# Altium PCB laser_driver2.PcbDoc (part 1 of 2)
Units mm, origin at the board's own origin, x right, y up, seen from the top; angles counter-clockwise.
Board outline 75 x 96.01 mm, 2 copper layers (TOP, BOTTOM), stack 0.264 mm thick; 144 components, 21 nets, 356 pads, 80 vias.
Unrouted connection lines stored in the file: 63.
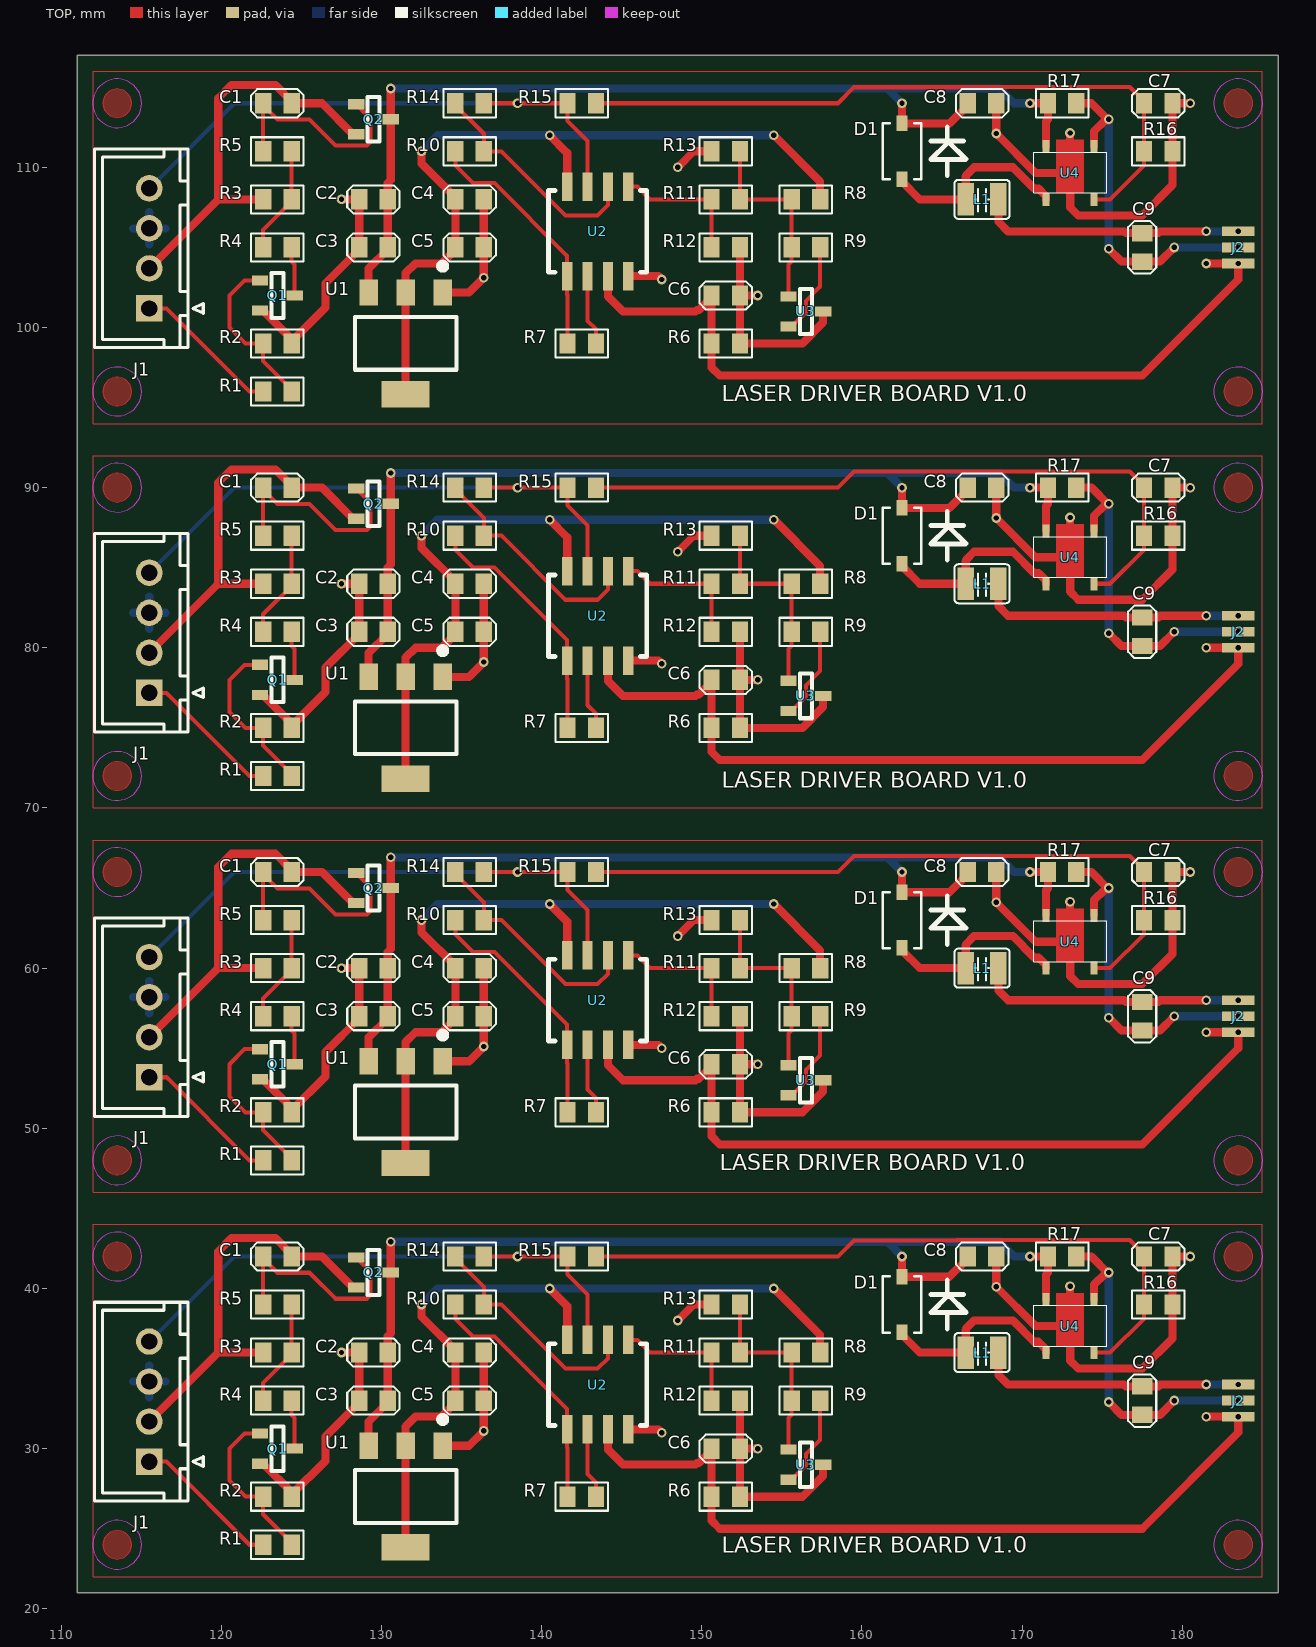
[diagram p0: TOP view]
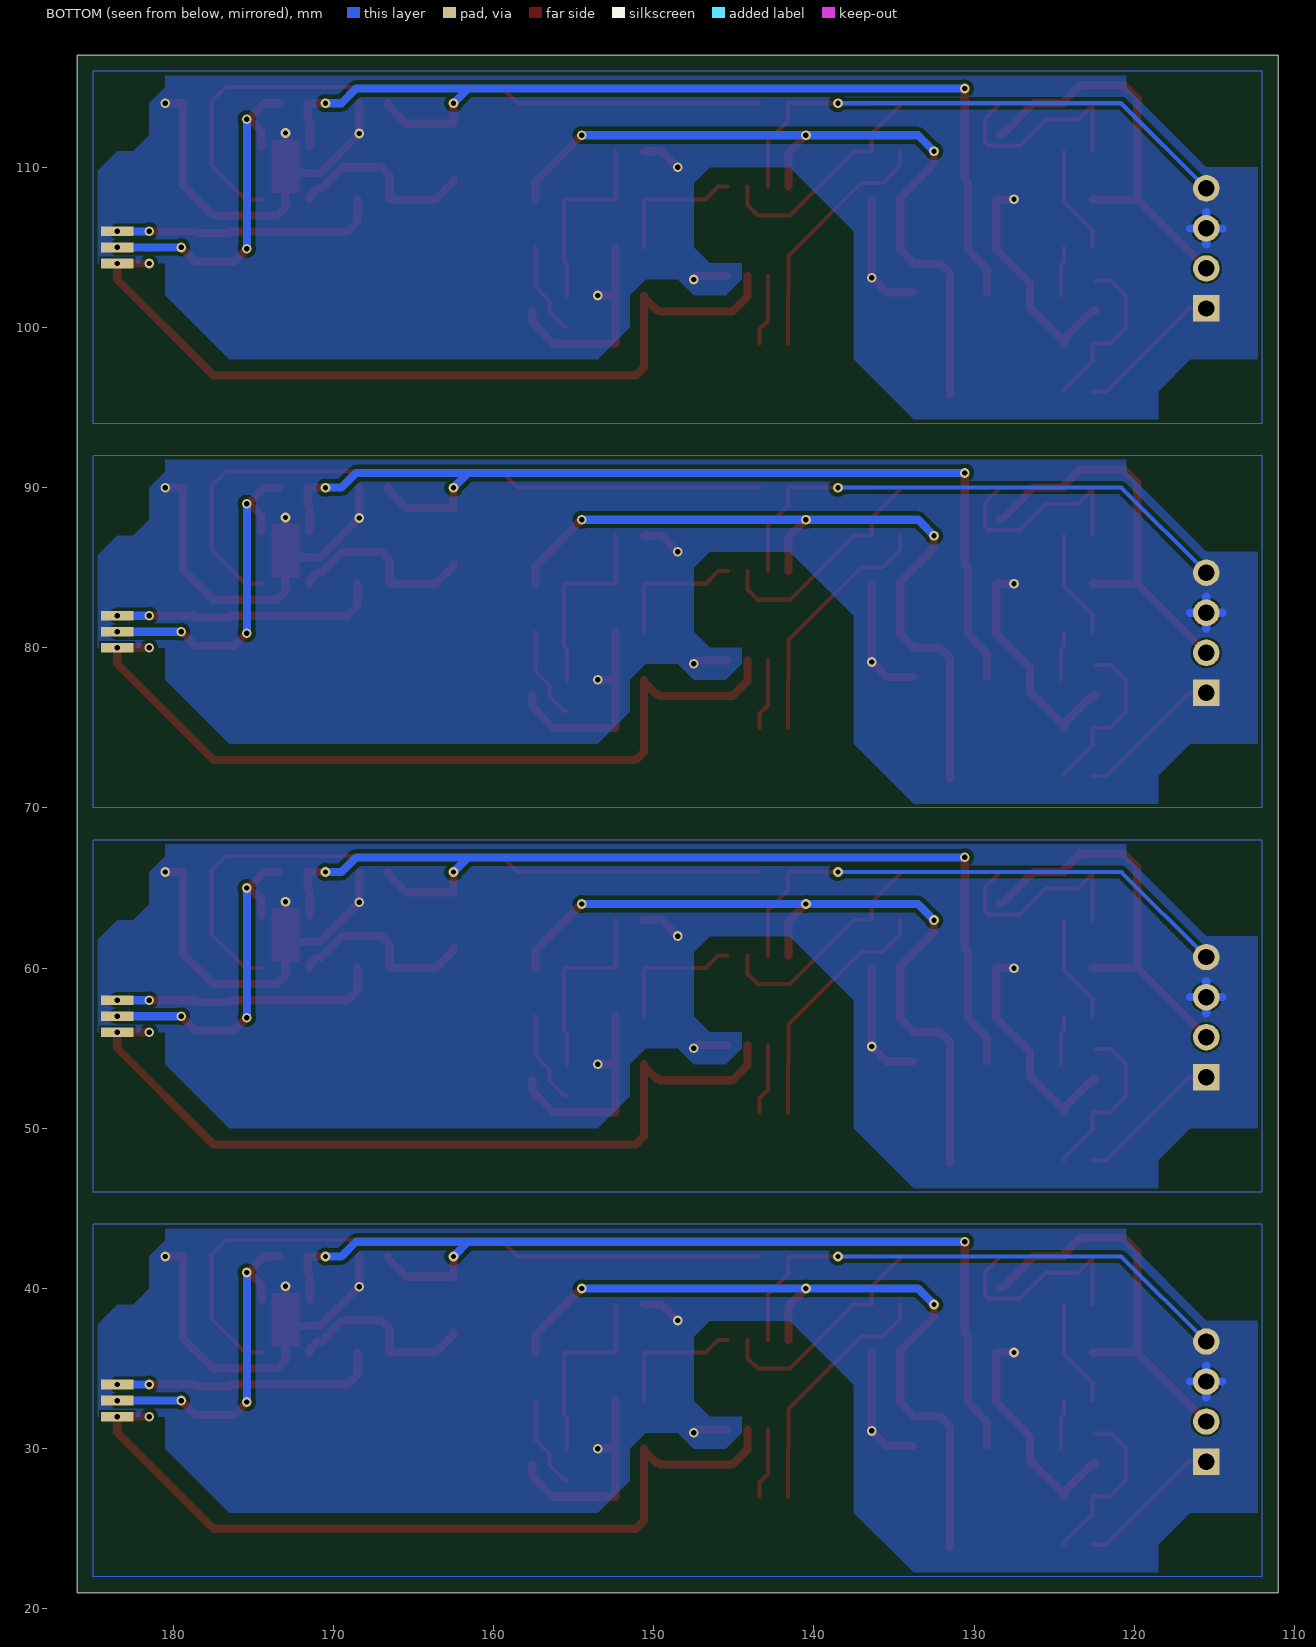
[diagram p1: BOTTOM view, seen from below]

## Layer stack, top to bottom
Top Solder: solder mask 0.0102, Solder Resist, Dk 3.5
TOP: signal copper 0.0305
Dielectric 1: core 0.2032, FR-4, Dk 4.5
BOTTOM: signal copper 0.0305
Bottom Solder: solder mask 0.0102, Solder Resist, Dk 3.5

## Board outline
111,20.991 111,117 186,117 186,20.991

## Design rules (kind name [scope] priority, off if disabled: settings)
Clearance [All] p1: gap=0.254
PlaneConnect [All] p1: planeconnectstyle=Direct reliefexpansion=0.508 reliefentries=4 reliefconductorwidth=0.254 reliefairgap=0.254
PolygonConnect [All] p1: connectstyle=Direct reliefconductorwidth=0.254 reliefentries=4 polygonreliefangle="90 Angle" airgapwidth=0.254
RoutingVias [All] p1: holewidth=0.711 width=1.27 viastyle="Through Hole" minholewidth=0.711 minwidth=1.27 maxholewidth=0.711 maxwidth=1.27
SolderMaskExpansion [All] p1: expansion=0.102
Width [All] p1: maxlimit=0.254 minlimit=0.254 preferedwidth=0.254 impedancedriven=TRUE minimp=87.860000 maximp=87.960000 favimp=87.770000
29 further rules are at their usual default settings.

## Components (designator, comment, footprint, x,y, rotation, side; value= is the part's Value field where it differs from the comment)
C1 "C_GENERIC_C0805_0.1UF" C0805 123.5,114 r180 top
C1 "C_GENERIC_C0805_0.1UF" C0805 123.5,89.997 r180 top
C1 "C_GENERIC_C0805_0.1UF" C0805 123.5,65.994 r180 top
C1 "C_GENERIC_C0805_0.1UF" C0805 123.5,41.991 r180 top
C2 "C_GENERIC_C0805_10UF" C0805 129.5,108 r180 top
C2 "C_GENERIC_C0805_10UF" C0805 129.5,83.997 r180 top
C2 "C_GENERIC_C0805_10UF" C0805 129.5,59.994 r180 top
C2 "C_GENERIC_C0805_10UF" C0805 129.5,35.991 r180 top
C3 "C_GENERIC_C0805_0.1UF" C0805 129.5,105 r180 top
C3 "C_GENERIC_C0805_0.1UF" C0805 129.5,80.997 r180 top
C3 "C_GENERIC_C0805_0.1UF" C0805 129.5,56.994 r180 top
C3 "C_GENERIC_C0805_0.1UF" C0805 129.5,32.991 r180 top
C4 "C_GENERIC_C0805_10UF" C0805 135.5,108 r0 top
C4 "C_GENERIC_C0805_10UF" C0805 135.5,83.997 r0 top
C4 "C_GENERIC_C0805_10UF" C0805 135.5,59.994 r0 top
C4 "C_GENERIC_C0805_10UF" C0805 135.5,35.991 r0 top
C5 "C_GENERIC_C0805_0.1UF" C0805 135.5,105 r0 top
C5 "C_GENERIC_C0805_0.1UF" C0805 135.5,80.997 r0 top
C5 "C_GENERIC_C0805_0.1UF" C0805 135.5,56.994 r0 top
C5 "C_GENERIC_C0805_0.1UF" C0805 135.5,32.991 r0 top
C6 "C_GENERIC_C0805_10PF" C0805 151.5,102 r0 top
C6 "C_GENERIC_C0805_10PF" C0805 151.5,77.997 r0 top
C6 "C_GENERIC_C0805_10PF" C0805 151.5,53.994 r0 top
C6 "C_GENERIC_C0805_10PF" C0805 151.5,29.991 r0 top
C7 "C_GENERIC_C0805_0.1UF" C0805 178.5,114 r0 top
C7 "C_GENERIC_C0805_0.1UF" C0805 178.5,89.997 r0 top
C7 "C_GENERIC_C0805_0.1UF" C0805 178.5,65.994 r0 top
C7 "C_GENERIC_C0805_0.1UF" C0805 178.5,41.991 r0 top
C8 "C_GENERIC_C0805_4.7UF" C0805 167.5,114 r0 top
C8 "C_GENERIC_C0805_4.7UF" C0805 167.5,89.997 r0 top
C8 "C_GENERIC_C0805_4.7UF" C0805 167.5,65.994 r0 top
C8 "C_GENERIC_C0805_4.7UF" C0805 167.5,41.991 r0 top
C9 "C_GENERIC_C0805_1UF" C0805 177.5,105 r270 top
C9 "C_GENERIC_C0805_1UF" C0805 177.5,80.997 r270 top
C9 "C_GENERIC_C0805_1UF" C0805 177.5,56.994 r270 top
C9 "C_GENERIC_C0805_1UF" C0805 177.5,32.991 r270 top
D1 "DIODE SCHOTTKY_0_SOD-123_SS14" SOD-123 162.5,111 r90 top
D1 "DIODE SCHOTTKY_0_SOD-123_SS14" SOD-123 162.5,86.997 r90 top
D1 "DIODE SCHOTTKY_0_SOD-123_SS14" SOD-123 162.5,62.994 r90 top
D1 "DIODE SCHOTTKY_0_SOD-123_SS14" SOD-123 162.5,38.991 r90 top
J1 "HEADER 4_WAFER1X4-2_54MM_HEADER" WAFER1X4-2_54MM 115,104.94 r90 top
J1 "HEADER 4_WAFER1X4-2_54MM_HEADER" WAFER1X4-2_54MM 115,80.937 r90 top
J1 "HEADER 4_WAFER1X4-2_54MM_HEADER" WAFER1X4-2_54MM 115,56.934 r90 top
J1 "HEADER 4_WAFER1X4-2_54MM_HEADER" WAFER1X4-2_54MM 115,32.931 r90 top
J2 "HEADER 3_LASER_HEADER 3" LASER 183.5,105 r270 top
J2 "HEADER 3_LASER_HEADER 3" LASER 183.5,80.997 r270 top
J2 "HEADER 3_LASER_HEADER 3" LASER 183.5,56.994 r270 top
J2 "HEADER 3_LASER_HEADER 3" LASER 183.5,32.991 r270 top
L1 "L_2.2UH-1.48A_CMS_L1008_27UH" L1008 167.5,108 r0 top
L1 "L_2.2UH-1.48A_CMS_L1008_27UH" L1008 167.5,83.997 r0 top
L1 "L_2.2UH-1.48A_CMS_L1008_27UH" L1008 167.5,59.994 r0 top
L1 "L_2.2UH-1.48A_CMS_L1008_27UH" L1008 167.5,35.991 r0 top
Q1 "NPN_0_SOT-23_MMBT3904" SOT-23 123.5,102 r270 top
Q1 "NPN_0_SOT-23_MMBT3904" SOT-23 123.5,77.997 r270 top
Q1 "NPN_0_SOT-23_MMBT3904" SOT-23 123.5,53.994 r270 top
Q1 "NPN_0_SOT-23_MMBT3904" SOT-23 123.5,29.991 r270 top
Q2 "TM3401_SOT-23_AO3401" SOT-23 129.5,113 r270 top
Q2 "TM3401_SOT-23_AO3401" SOT-23 129.5,88.997 r270 top
Q2 "TM3401_SOT-23_AO3401" SOT-23 129.5,64.994 r270 top
Q2 "TM3401_SOT-23_AO3401" SOT-23 129.5,40.991 r270 top
R1 "R_GENERIC_R0805_10K 1%_1%" R0805 123.5,96 r0 top
R1 "R_GENERIC_R0805_10K 1%_1%" R0805 123.5,71.997 r0 top
R1 "R_GENERIC_R0805_10K 1%_1%" R0805 123.5,47.994 r0 top
R1 "R_GENERIC_R0805_10K 1%_1%" R0805 123.5,23.991 r0 top
R2 "R_GENERIC_R0805_10K 1%_1%" R0805 123.5,99 r0 top
R2 "R_GENERIC_R0805_10K 1%_1%" R0805 123.5,74.997 r0 top
R2 "R_GENERIC_R0805_10K 1%_1%" R0805 123.5,50.994 r0 top
R2 "R_GENERIC_R0805_10K 1%_1%" R0805 123.5,26.991 r0 top
R3 "R_GENERIC_R0805_33K 1%_1%" R0805 123.5,108 r0 top
R3 "R_GENERIC_R0805_33K 1%_1%" R0805 123.5,83.997 r0 top
R3 "R_GENERIC_R0805_33K 1%_1%" R0805 123.5,59.994 r0 top
R3 "R_GENERIC_R0805_33K 1%_1%" R0805 123.5,35.991 r0 top
R4 "R_GENERIC_R0805_6K8 1%_1%" R0805 123.5,105 r0 top
R4 "R_GENERIC_R0805_6K8 1%_1%" R0805 123.5,80.997 r0 top
R4 "R_GENERIC_R0805_6K8 1%_1%" R0805 123.5,56.994 r0 top
R4 "R_GENERIC_R0805_6K8 1%_1%" R0805 123.5,32.991 r0 top
R5 "R_GENERIC_R0805_100K 1%_1%" R0805 123.5,111 r180 top
R5 "R_GENERIC_R0805_100K 1%_1%" R0805 123.5,86.997 r180 top
R5 "R_GENERIC_R0805_100K 1%_1%" R0805 123.5,62.994 r180 top
R5 "R_GENERIC_R0805_100K 1%_1%" R0805 123.5,38.991 r180 top
R6 "R_GENERIC_R0805_1M 1%_1%" R0805 151.5,99 r180 top
R6 "R_GENERIC_R0805_1M 1%_1%" R0805 151.5,74.997 r180 top
R6 "R_GENERIC_R0805_1M 1%_1%" R0805 151.5,50.994 r180 top
R6 "R_GENERIC_R0805_1M 1%_1%" R0805 151.5,26.991 r180 top
R7 "R_GENERIC_R0805_0R_1%" R0805 142.5,99 r180 top
R7 "R_GENERIC_R0805_0R_1%" R0805 142.5,74.997 r180 top
R7 "R_GENERIC_R0805_0R_1%" R0805 142.5,50.994 r180 top
R7 "R_GENERIC_R0805_0R_1%" R0805 142.5,26.991 r180 top
R8 "R_GENERIC_R0805_250R 1%_1%" R0805 156.5,108 r180 top
R8 "R_GENERIC_R0805_250R 1%_1%" R0805 156.5,83.997 r180 top
R8 "R_GENERIC_R0805_250R 1%_1%" R0805 156.5,59.994 r180 top
R8 "R_GENERIC_R0805_250R 1%_1%" R0805 156.5,35.991 r180 top
R9 "R_GENERIC_R0805_0R 1%_1%" R0805 156.5,105 r0 top
R9 "R_GENERIC_R0805_0R 1%_1%" R0805 156.5,80.997 r0 top
R9 "R_GENERIC_R0805_0R 1%_1%" R0805 156.5,56.994 r0 top
R9 "R_GENERIC_R0805_0R 1%_1%" R0805 156.5,32.991 r0 top
R10 "R_GENERIC_R0805_10K 1%_1%" R0805 135.5,111 r0 top
R10 "R_GENERIC_R0805_10K 1%_1%" R0805 135.5,86.997 r0 top
R10 "R_GENERIC_R0805_10K 1%_1%" R0805 135.5,62.994 r0 top
R10 "R_GENERIC_R0805_10K 1%_1%" R0805 135.5,38.991 r0 top
R11 "R_GENERIC_R0805_10K 1%_1%" R0805 151.5,108 r180 top
R11 "R_GENERIC_R0805_10K 1%_1%" R0805 151.5,83.997 r180 top
R11 "R_GENERIC_R0805_10K 1%_1%" R0805 151.5,59.994 r180 top
R11 "R_GENERIC_R0805_10K 1%_1%" R0805 151.5,35.991 r180 top
R12 "R_GENERIC_R0805_10K 1%_1%" R0805 151.5,105 r0 top
R12 "R_GENERIC_R0805_10K 1%_1%" R0805 151.5,80.997 r0 top
R12 "R_GENERIC_R0805_10K 1%_1%" R0805 151.5,56.994 r0 top
R12 "R_GENERIC_R0805_10K 1%_1%" R0805 151.5,32.991 r0 top
R13 "R_GENERIC_R0805_NC_1%" R0805 151.5,111 r180 top
R13 "R_GENERIC_R0805_NC_1%" R0805 151.5,86.997 r180 top
R13 "R_GENERIC_R0805_NC_1%" R0805 151.5,62.994 r180 top
R13 "R_GENERIC_R0805_NC_1%" R0805 151.5,38.991 r180 top
R14 "R_GENERIC_R0805_10K 1%_1%" R0805 135.5,114 r0 top
R14 "R_GENERIC_R0805_10K 1%_1%" R0805 135.5,89.997 r0 top
R14 "R_GENERIC_R0805_10K 1%_1%" R0805 135.5,65.994 r0 top
R14 "R_GENERIC_R0805_10K 1%_1%" R0805 135.5,41.991 r0 top
R15 "R_GENERIC_R0805_1K 1%_1%" R0805 142.5,114 r0 top
R15 "R_GENERIC_R0805_1K 1%_1%" R0805 142.5,89.997 r0 top
R15 "R_GENERIC_R0805_1K 1%_1%" R0805 142.5,65.994 r0 top
R15 "R_GENERIC_R0805_1K 1%_1%" R0805 142.5,41.991 r0 top
R16 "R_GENERIC_R0805_1M 1%_1%" R0805 178.5,111 r0 top
R16 "R_GENERIC_R0805_1M 1%_1%" R0805 178.5,86.997 r0 top
R16 "R_GENERIC_R0805_1M 1%_1%" R0805 178.5,62.994 r0 top
R16 "R_GENERIC_R0805_1M 1%_1%" R0805 178.5,38.991 r0 top
R17 "R_GENERIC_R0805_1R 0.1%_0.1%" R0805 172.5,114 r0 top
R17 "R_GENERIC_R0805_1R 0.1%_0.1%" R0805 172.5,89.997 r0 top
R17 "R_GENERIC_R0805_1R 0.1%_0.1%" R0805 172.5,65.994 r0 top
R17 "R_GENERIC_R0805_1R 0.1%_0.1%" R0805 172.5,41.991 r0 top
U1 "AS1117_SOT223_AMS1117-5" SOT223 131.51,98.882 r180 top
U1 "AS1117_SOT223_AMS1117-5" SOT223 131.51,74.879 r180 top
U1 "AS1117_SOT223_AMS1117-5" SOT223 131.51,50.876 r180 top
U1 "AS1117_SOT223_AMS1117-5" SOT223 131.51,26.873 r180 top
U2 "AD8032ARZ_SOP8_244_0500_069_AD8" SOP8_244_0500_069 143.5,106 r90 top
U2 "AD8032ARZ_SOP8_244_0500_069_AD8" SOP8_244_0500_069 143.5,81.997 r90 top
U2 "AD8032ARZ_SOP8_244_0500_069_AD8" SOP8_244_0500_069 143.5,57.994 r90 top
U2 "AD8032ARZ_SOP8_244_0500_069_AD8" SOP8_244_0500_069 143.5,33.991 r90 top
U3 "TL431_SOT-23_TL431ACDBZR" SOT-23 156.5,101 r270 top
U3 "TL431_SOT-23_TL431ACDBZR" SOT-23 156.5,76.997 r270 top
U3 "TL431_SOT-23_TL431ACDBZR" SOT-23 156.5,52.994 r270 top
U3 "TL431_SOT-23_TL431ACDBZR" SOT-23 156.5,28.991 r270 top
U4 "MT7201C_SOT89-5_MT7201C" SOT89-5 172.999,109.626 r90 top
U4 "MT7201C_SOT89-5_MT7201C" SOT89-5 172.999,85.623 r90 top
U4 "MT7201C_SOT89-5_MT7201C" SOT89-5 172.999,61.62 r90 top
U4 "MT7201C_SOT89-5_MT7201C" SOT89-5 172.999,37.617 r90 top

## Footprints (in the part's own frame and the unit in brackets; to place one, negate y for a bottom-side part, rotate by r counter-clockwise, add the part's x,y. Pads: shape width x height; smd on the part's side, far side on the other; paste and mask are expansions set on the pad)
C0805 [mil] "C0805"
  rect 40x50 smd: 1(-35,0) 2(35,0)
  silkscreen extent -64,-35 64,35
L1008 [mil] "L1008"
  rect 40x80 smd: 1(-40,0) 2(40,0)
  silkscreen extent -68,-48 68,48
LASER [mil] "LASER"
  rect 24x80 / inner round 60 / far side rect 24x80 hole 13: 1(-39.37,0) 2(0,0) 3(39.37,0)
R0805 [mil] "R0805"
  rect 40x50 smd: 1(-35,0) 2(35,0)
  silkscreen extent -64,-34 64,34
SOD-123 [mil] "SOD-123"
  rect 38x26 smd: 1(68.41,0) 2(-68.41,0)
  silkscreen extent -69,-157 69,47
SOP8_244_0500_069 [mil] "SOP8_244_0500_069"
  rect 70x25 smd: 1(-110,75) 2(-110,25) 3(-110,-25) 4(-110,-75) 5(110,-75) 6(110,-25) 7(110,25) 8(110,75)
  silkscreen extent -200,-120 101,120
SOT89-5 [mil] "SOT89-5"
  rect 32x17 smd: 1(-64,59) 3(-64,-59) 4(66,-59) 5(66,59)
  oct 1x1 smd: 2(1,0)
  silkscreen extent -48,-90 52,90
SOT223 [mil] "SOT223"
  rect 45x65 smd: 1(-91,-130) 2(0,-130) 3(91,-130)
  rect 118x65 smd: 4(0,120)
  silkscreen extent -125,-202 125,60
SOT-23 [mil] "SOT-23"
  rect 25x40 smd: 1(-37,-42.5) 2(37,-42.5) 3(0,42.5)
  silkscreen extent -55,-15 55,15
WAFER1X4-2_54MM [mil] "WAFER1X4-2_54MM"
  rect 65x65 / inner round 60 / far side rect 65x65 hole 40: 1(-147.63,-19.68)
  round 65 / inner round 60 / far side round 65 hole 40: 2(-49.2,-19.68) 3(49.22,-19.68) 4(147.65,-19.68)
  silkscreen extent -244,-153 244,115

## Via types
v1: diameter 0.61, hole 0.33, TOP to BOTTOM, 80 vias

## Nets (pads, with @x,y where several pads share a name; then routed paths per layer and width w, separated by ;. In a path a pad name is that pad's centre, name@x,y a point inside that pad or via, vN(x,y) a via of type N, cw(c..) or ccw(c..) an arc to the next point about the centre after c; other vN are vias at no path point)
5V: C4.1 C5.1 R8.1 U1.2 U1.4 U2.8 | length 198.2
  TOP w0.508: U1.4@131.51,23.825 U1.2@131.51,30.175 131.51,31.382 132.119,31.991 133.738,31.991 134.611,32.864 C5.1@134.611,32.991 C4.1@134.611,35.991 134.611,36.118 132.5,38.229 v1(132.5,38.991) ; U1.4@131.51,47.828 U1.2@131.51,54.178 131.51,55.385 132.119,55.994 133.738,55.994 134.611,56.867 C5.1@134.611,56.994 C4.1@134.611,59.994 134.611,60.121 132.5,62.232 v1(132.5,62.994) ; U1.4@131.51,71.831 U1.2@131.51,78.181 131.51,79.388 132.119,79.997 133.738,79.997 134.611,80.87 C5.1@134.611,80.997 C4.1@134.611,83.997 134.611,84.124 132.5,86.235 v1(132.5,86.997) ; U1.4@131.51,95.834 U1.2@131.51,102.184 131.51,103.391 132.119,104 133.738,104 134.611,104.873 C5.1@134.611,105 C4.1@134.611,108 134.611,108.127 132.5,110.238 v1(132.5,111) ; v1(140.5,39.991) 141.595,38.896 U2.8@141.595,36.785 ; v1(140.5,63.994) 141.595,62.899 U2.8@141.595,60.788 ; v1(140.5,87.997) 141.595,86.902 U2.8@141.595,84.791 ; v1(140.5,112) 141.595,110.905 U2.8@141.595,108.794 ; v1(154.5,39.991) 157.389,37.102 R8.1@157.389,35.991 ; v1(154.5,63.994) 157.389,61.105 R8.1@157.389,59.994 ; v1(154.5,87.997) 157.389,85.108 R8.1@157.389,83.997 ; v1(154.5,112) 157.389,109.111 R8.1@157.389,108
  BOTTOM w0.508: v1(132.5,38.991) 133.5,39.991 v1(140.5,39.991) v1(154.5,39.991) ; v1(132.5,62.994) 133.5,63.994 v1(140.5,63.994) v1(154.5,63.994) ; v1(132.5,86.997) 133.5,87.997 v1(140.5,87.997) v1(154.5,87.997) ; v1(132.5,111) 133.5,112 v1(140.5,112) v1(154.5,112)
ADJ: J1.4 R14.2 R15.1 U2.7 | length 144.6
  TOP w0.254: R14.2@136.389,41.991 v1(138.5,41.991) R15.1@141.611,41.991 141.611,40.88 142.865,39.626 U2.7@142.865,36.785 ; R14.2@136.389,65.994 v1(138.5,65.994) R15.1@141.611,65.994 141.611,64.883 142.865,63.629 U2.7@142.865,60.788 ; R14.2@136.389,89.997 v1(138.5,89.997) R15.1@141.611,89.997 141.611,88.886 142.865,87.632 U2.7@142.865,84.791 ; R14.2@136.389,114 v1(138.5,114) R15.1@141.611,114 141.611,112.889 142.865,111.635 U2.7@142.865,108.794
  BOTTOM w0.254: J1.4@115.5,36.681 120.81,41.991 v1(138.5,41.991) ; J1.4@115.5,60.684 120.81,65.994 v1(138.5,65.994) ; J1.4@115.5,84.687 120.81,89.997 v1(138.5,89.997) ; J1.4@115.5,108.69 120.81,114 v1(138.5,114)
COM: C9.2 J2.2 R17.2 U4.4 | length 86.3
  TOP w0.508: R17.2@173.389,41.991 174.324,41.991 v1@175.408,40.907 ; R17.2@173.389,65.994 174.324,65.994 v1@175.408,64.91 ; R17.2@173.389,89.997 174.324,89.997 v1@175.408,88.913 ; R17.2@173.389,114 174.324,114 v1@175.408,112.916 ; U4.4@174.497,39.293 174.497,40.24 175.165,40.907 v1@175.408,40.907 ; U4.4@174.497,63.296 174.497,64.243 175.165,64.91 v1@175.408,64.91 ; U4.4@174.497,87.299 174.497,88.246 175.165,88.913 v1@175.408,88.913 ; U4.4@174.497,111.302 174.497,112.249 175.165,112.916 v1@175.408,112.916 ; v1(175.408,32.899) 176.205,32.102 C9.2@177.5,32.102 178.611,32.102 v1(179.5,32.991) ; v1(175.408,40.991) v1@175.408,40.907 ; v1(175.408,56.902) 176.205,56.105 C9.2@177.5,56.105 178.611,56.105 v1(179.5,56.994) ; v1(175.408,64.994) v1@175.408,64.91 ; v1(175.408,80.905) 176.205,80.108 C9.2@177.5,80.108 178.611,80.108 v1(179.5,80.997) ; v1(175.408,88.997) v1@175.408,88.913 ; v1(175.408,104.908) 176.205,104.111 C9.2@177.5,104.111 178.611,104.111 v1(179.5,105) ; v1(175.408,113) v1@175.408,112.916
  BOTTOM w0.508: v1(175.408,32.899) v1(175.408,40.991) ; v1(175.408,56.902) v1(175.408,64.994) ; v1(175.408,80.905) v1(175.408,88.997) ; v1(175.408,104.908) v1(175.408,113) ; v1(179.5,32.991) J2.2@183.5,32.991 ; v1(179.5,56.994) J2.2@183.5,56.994 ; v1(179.5,80.997) J2.2@183.5,80.997 ; v1(179.5,105) J2.2@183.5,105
EN: J1.1 R1.1 | length 37
  TOP w0.254: J1.1@115.5,29.181 116.58,29.181 121.769,23.991 R1.1@122.611,23.991 ; J1.1@115.5,53.184 116.58,53.184 121.769,47.994 R1.1@122.611,47.994 ; J1.1@115.5,77.187 116.58,77.187 121.769,71.997 R1.1@122.611,71.997 ; J1.1@115.5,101.19 116.58,101.19 121.769,96 R1.1@122.611,96
GND: C2.2 C3.2 C4.2 C5.2 C6.2 C7.2 C8.2 J1.3 Q1.2 R2.2 R6.1 R12.2 R13.2 R16.2 U1.1 U2.4 U3.3 U4.2 | length 282.3
  TOP w0.508: Q1.2@122.42,29.051 122.611,29.051 124.389,27.273 R2.2@124.389,27.118 ; Q1.2@122.42,53.054 122.611,53.054 124.389,51.276 R2.2@124.389,51.121 ; Q1.2@122.42,77.057 122.611,77.057 124.389,75.279 R2.2@124.389,75.124 ; Q1.2@122.42,101.06 122.611,101.06 124.389,99.282 R2.2@124.389,99.127 ; R2.2@124.389,26.991 R2.2@124.389,27.118 ; R2.2@124.389,50.994 R2.2@124.389,51.121 ; R2.2@124.389,74.997 R2.2@124.389,75.124 ; R2.2@124.389,99 R2.2@124.389,99.127 ; v1(127.5,35.991) C2.2@128.611,35.991 C3.2@128.611,32.991 128.611,32.864 126.5,30.753 126.5,29.229 R2.2@124.389,27.118 ; v1(127.5,59.994) C2.2@128.611,59.994 C3.2@128.611,56.994 128.611,56.867 126.5,54.756 126.5,53.232 R2.2@124.389,51.121 ; v1(127.5,83.997) C2.2@128.611,83.997 C3.2@128.611,80.997 128.611,80.87 126.5,78.759 126.5,77.235 R2.2@124.389,75.124 ; v1(127.5,108) C2.2@128.611,108 C3.2@128.611,105 128.611,104.873 126.5,102.762 126.5,101.238 R2.2@124.389,99.127 ; U1.1@133.821,30.175 135.462,30.175 v1(136.389,31.102) C5.2@136.389,32.991 C4.2@136.389,35.991 ; U1.1@133.821,54.178 135.462,54.178 v1(136.389,55.105) C5.2@136.389,56.994 C4.2@136.389,59.994 ; U1.1@133.821,78.181 135.462,78.181 v1(136.389,79.108) C5.2@136.389,80.997 C4.2@136.389,83.997 ; U1.1@133.821,102.184 135.462,102.184 v1(136.389,103.111) C5.2@136.389,105 C4.2@136.389,108 ; U2.4@145.405,31.197 147.294,31.197 v1(147.5,30.991) ; U2.4@145.405,55.2 147.294,55.2 v1(147.5,54.994) ; U2.4@145.405,79.203 147.294,79.203 v1(147.5,78.997) ; U2.4@145.405,103.206 147.294,103.206 v1(147.5,103) ; v1(148.5,37.991) 149.5,38.991 R13.2@150.611,38.991 ; v1(148.5,61.994) 149.5,62.994 R13.2@150.611,62.994 ; v1(148.5,85.997) 149.5,86.997 R13.2@150.611,86.997 ; v1(148.5,110) 149.5,111 R13.2@150.611,111 ; R12.2@152.389,32.991 C6.2@152.389,29.991 ; R12.2@152.389,56.994 C6.2@152.389,53.994 ; R12.2@152.389,80.997 C6.2@152.389,77.997 ; R12.2@152.389,105 C6.2@152.389,102 ; v1(153.5,29.991) C6.2@152.389,29.991 ; v1(153.5,53.994) C6.2@152.389,53.994 ; v1(153.5,77.997) C6.2@152.389,77.997 ; v1(153.5,102) C6.2@152.389,102 ; U3.3@157.579,28.991 157.579,28.293 156.278,26.991 R6.1@152.389,26.991 C6.2@152.389,29.991 ; U3.3@157.579,52.994 157.579,52.296 156.278,50.994 R6.1@152.389,50.994 C6.2@152.389,53.994 ; U3.3@157.579,76.997 157.579,76.299 156.278,74.997 R6.1@152.389,74.997 C6.2@152.389,77.997 ; U3.3@157.579,101 157.579,100.302 156.278,99 R6.1@152.389,99 C6.2@152.389,102 ; C8.2@168.389,41.991 v1(168.389,40.102) 170.849,37.642 U4.2@172.999,37.642 ; C8.2@168.389,65.994 v1(168.389,64.105) 170.849,61.645 U4.2@172.999,61.645 ; C8.2@168.389,89.997 v1(168.389,88.108) 170.849,85.648 U4.2@172.999,85.648 ; C8.2@168.389,114 v1(168.389,112.111) 170.849,109.651 U4.2@172.999,109.651 ; v1(172.999,40.131) U4.2@172.999,37.642 ; v1(172.999,64.134) U4.2@172.999,61.645 ; v1(172.999,88.137) U4.2@172.999,85.648 ; v1(172.999,112.14) U4.2@172.999,109.651 ; v1(180.5,41.991) C7.2@179.389,41.991 R16.2@179.389,38.991 179.389,36.88 177.5,34.991 173.507,34.991 172.999,35.499 U4.2@172.999,37.642 ; v1(180.5,65.994) C7.2@179.389,65.994 R16.2@179.389,62.994 179.389,60.883 177.5,58.994 173.507,58.994 172.999,59.502 U4.2@172.999,61.645 ; v1(180.5,89.997) C7.2@179.389,89.997 R16.2@179.389,86.997 179.389,84.886 177.5,82.997 173.507,82.997 172.999,83.505 U4.2@172.999,85.648 ; v1(180.5,114) C7.2@179.389,114 R16.2@179.389,111 179.389,108.889 177.5,107 173.507,107 172.999,107.508 U4.2@172.999,109.651
  BOTTOM w0.508: 114.496,34.181 J1.3@115.5,34.181 ; 114.496,58.184 J1.3@115.5,58.184 ; 114.496,82.187 J1.3@115.5,82.187 ; 114.496,106.19 J1.3@115.5,106.19 ; 115.5,33.178 J1.3@115.5,34.181 ; 115.5,35.185 J1.3@115.5,34.181 ; 115.5,57.181 J1.3@115.5,58.184 ; 115.5,59.188 J1.3@115.5,58.184 ; 115.5,81.184 J1.3@115.5,82.187 ; 115.5,83.191 J1.3@115.5,82.187 ; 115.5,105.187 J1.3@115.5,106.19 ; 115.5,107.194 J1.3@115.5,106.19 ; 116.504,34.181 J1.3@115.5,34.181 ; 116.504,58.184 J1.3@115.5,58.184 ; 116.504,82.187 J1.3@115.5,82.187 ; 116.504,106.19 J1.3@115.5,106.19
LD-: C9.1 J2.1 L1.2 | length 66.9
  TOP w0.508: L1.2@168.516,35.991 168.516,34.594 169.119,33.991 176.373,33.991 176.484,33.88 C9.1@177.5,33.88 178.516,33.88 178.627,33.991 v1(181.5,33.991) ; L1.2@168.516,59.994 168.516,58.597 169.119,57.994 176.373,57.994 176.484,57.883 C9.1@177.5,57.883 178.516,57.883 178.627,57.994 v1(181.5,57.994) ; L1.2@168.516,83.997 168.516,82.6 169.119,81.997 176.373,81.997 176.484,81.886 C9.1@177.5,81.886 178.516,81.886 178.627,81.997 v1(181.5,81.997) ; L1.2@168.516,108 168.516,106.603 169.119,106 176.373,106 176.484,105.889 C9.1@177.5,105.889 178.516,105.889 178.627,106 v1(181.5,106)
  BOTTOM w0.508: v1(181.5,33.991) J2.1@183.5,33.991 ; v1(181.5,57.994) J2.1@183.5,57.994 ; v1(181.5,81.997) J2.1@183.5,81.997 ; v1(181.5,106) J2.1@183.5,106
N00162: D1.2 L1.1 U4.1 | length 49
  TOP w0.508: D1.2@162.5,37.253 162.5,37.101 163.61,35.991 L1.1@166.484,35.991 166.484,37.388 166.5,37.404 166.5,37.483 167.008,37.991 169.422,37.991 170.746,36.667 171.015,36.667 171.5,36.181 U4.1@171.5,35.991 ; D1.2@162.5,61.256 162.5,61.104 163.61,59.994 L1.1@166.484,59.994 166.484,61.391 166.5,61.407 166.5,61.486 167.008,61.994 169.422,61.994 170.746,60.67 171.015,60.67 171.5,60.184 U4.1@171.5,59.994 ; D1.2@162.5,85.259 162.5,85.107 163.61,83.997 L1.1@166.484,83.997 166.484,85.394 166.5,85.41 166.5,85.489 167.008,85.997 169.422,85.997 170.746,84.673 171.015,84.673 171.5,84.187 U4.1@171.5,83.997 ; D1.2@162.5,109.262 162.5,109.11 163.61,108 L1.1@166.484,108 166.484,109.397 166.5,109.413 166.5,109.492 167.008,110 169.422,110 170.746,108.676 171.015,108.676 171.5,108.19 U4.1@171.5,108
N01015: C7.1 R15.2 R16.1 U4.3 | length 172.1
  TOP w0.254: R15.2@143.389,41.991 158.5,41.991 159.5,42.991 165.929,42.991 165.945,43.007 176.722,43.007 177.611,42.118 C7.1@177.611,41.991 R16.1@177.611,38.991 177.611,38.102 175.5,35.991 U4.3@174.497,35.991 ; R15.2@143.389,65.994 158.5,65.994 159.5,66.994 165.929,66.994 165.945,67.01 176.722,67.01 177.611,66.121 C7.1@177.611,65.994 R16.1@177.611,62.994 177.611,62.105 175.5,59.994 U4.3@174.497,59.994 ; R15.2@143.389,89.997 158.5,89.997 159.5,90.997 165.929,90.997 165.945,91.013 176.722,91.013 177.611,90.124 C7.1@177.611,89.997 R16.1@177.611,86.997 177.611,86.108 175.5,83.997 U4.3@174.497,83.997 ; R15.2@143.389,114 158.5,114 159.5,115 165.929,115 165.945,115.016 176.722,115.016 177.611,114.127 C7.1@177.611,114 R16.1@177.611,111 177.611,110.111 175.5,108 U4.3@174.497,108
N04030: R7.2 R10.1 U2.1 | length 62.8
  TOP w0.254: R10.1@134.611,38.991 134.611,38.102 135.706,37.007 137.055,37.007 141.595,32.467 U2.1@141.595,31.197 141.595,30.054 141.611,30.038 R7.2@141.611,26.991 ; R10.1@134.611,62.994 134.611,62.105 135.706,61.01 137.055,61.01 141.595,56.47 U2.1@141.595,55.2 141.595,54.057 141.611,54.041 R7.2@141.611,50.994 ; R10.1@134.611,86.997 134.611,86.108 135.706,85.013 137.055,85.013 141.595,80.473 U2.1@141.595,79.203 141.595,78.06 141.611,78.044 R7.2@141.611,74.997 ; R10.1@134.611,111 134.611,110.111 135.706,109.016 137.055,109.016 141.595,104.476 U2.1@141.595,103.206 141.595,102.063 141.611,102.047 R7.2@141.611,99
N04088: R7.1 U2.2 | length 17.7
  TOP w0.254: U2.2@142.865,31.197 142.865,28.404 143.389,27.88 R7.1@143.389,26.991 ; U2.2@142.865,55.2 142.865,52.407 143.389,51.883 R7.1@143.389,50.994 ; U2.2@142.865,79.203 142.865,76.41 143.389,75.886 R7.1@143.389,74.997 ; U2.2@142.865,103.206 142.865,100.413 143.389,99.889 R7.1@143.389,99
N05077: R9.2 U3.2 | length 23.5
  TOP w0.254: U3.2@155.42,28.051 155.611,28.051 156.5,28.94 156.5,29.646 157.389,30.535 R9.2@157.389,32.991 ; U3.2@155.42,52.054 155.611,52.054 156.5,52.943 156.5,53.649 157.389,54.538 R9.2@157.389,56.994 ; U3.2@155.42,76.057 155.611,76.057 156.5,76.946 156.5,77.652 157.389,78.541 R9.2@157.389,80.997 ; U3.2@155.42,100.06 155.611,100.06 156.5,100.949 156.5,101.655 157.389,102.544 R9.2@157.389,105
N05499: R10.2 R14.1 U2.6 | length 58.2
  TOP w0.254: R14.1@134.611,41.991 134.611,41.864 136.389,40.086 R10.2@136.389,38.991 137.5,38.991 141.5,34.991 143.5,34.991 144.135,35.626 U2.6@144.135,36.785 ; R14.1@134.611,65.994 134.611,65.867 136.389,64.089 R10.2@136.389,62.994 137.5,62.994 141.5,58.994 143.5,58.994 144.135,59.629 U2.6@144.135,60.788 ; R14.1@134.611,89.997 134.611,89.87 136.389,88.092 R10.2@136.389,86.997 137.5,86.997 141.5,82.997 143.5,82.997 144.135,83.632 U2.6@144.135,84.791 ; R14.1@134.611,114 134.611,113.873 136.389,112.095 R10.2@136.389,111 137.5,111 141.5,107 143.5,107 144.135,107.635 U2.6@144.135,108.794
N05583: R11.2 R12.1 U2.5 | length 34.1
  TOP w0.254: U2.5@145.405,36.785 145.977,36.785 146.77,35.991 R11.2@150.611,35.991 R12.1@150.611,32.991 ; U2.5@145.405,60.788 145.977,60.788 146.77,59.994 R11.2@150.611,59.994 R12.1@150.611,56.994 ; U2.5@145.405,84.791 145.977,84.791 146.77,83.997 R11.2@150.611,83.997 R12.1@150.611,80.997 ; U2.5@145.405,108.794 145.977,108.794 146.77,108 R11.2@150.611,108 R12.1@150.611,105
N08509: Q1.1 R1.2 R2.1 | length 42.3
  TOP w0.254: Q1.1@122.42,30.931 121.44,30.931 120.5,29.991 120.5,27.991 121.5,26.991 R2.1@122.611,26.991 122.611,25.896 124.389,24.118 R1.2@124.389,23.991 ; Q1.1@122.42,54.934 121.44,54.934 120.5,53.994 120.5,51.994 121.5,50.994 R2.1@122.611,50.994 122.611,49.899 124.389,48.121 R1.2@124.389,47.994 ; Q1.1@122.42,78.937 121.44,78.937 120.5,77.997 120.5,75.997 121.5,74.997 R2.1@122.611,74.997 122.611,73.902 124.389,72.124 R1.2@124.389,71.997 ; Q1.1@122.42,102.94 121.44,102.94 120.5,102 120.5,100 121.5,99 R2.1@122.611,99 122.611,97.905 124.389,96.127 R1.2@124.389,96
N08561: Q1.3 R4.2 | length 12.3
  TOP w0.254: R4.2@124.389,32.991 124.389,32.102 124.579,31.912 Q1.3@124.579,29.991 ; R4.2@124.389,56.994 124.389,56.105 124.579,55.915 Q1.3@124.579,53.994 ; R4.2@124.389,80.997 124.389,80.108 124.579,79.918 Q1.3@124.579,77.997 ; R4.2@124.389,105 124.389,104.111 124.579,103.921 Q1.3@124.579,102
N08565: R3.2 R4.1 R5.1 | length 26.9
  TOP w0.254: R4.1@122.611,32.991 122.611,34.086 124.389,35.864 R3.2@124.389,35.991 R5.1@124.389,38.991 ; R4.1@122.611,56.994 122.611,58.089 124.389,59.867 R3.2@124.389,59.994 R5.1@124.389,62.994 ; R4.1@122.611,80.997 122.611,82.092 124.389,83.87 R3.2@124.389,83.997 R5.1@124.389,86.997 ; R4.1@122.611,105 122.611,106.095 124.389,107.873 R3.2@124.389,108 R5.1@124.389,111
N13259: C1.2 Q2.1 R5.2 | length 54.2
  TOP w0.254: R5.2@122.611,38.991 C1.2@122.611,41.864 ; C1.2@122.611,41.991 C1.2@122.611,41.864 ; R5.2@122.611,62.994 C1.2@122.611,65.867 ; C1.2@122.611,65.994 C1.2@122.611,65.867 ; R5.2@122.611,86.997 C1.2@122.611,89.87 ; C1.2@122.611,89.997 C1.2@122.611,89.87 ; R5.2@122.611,111 C1.2@122.611,113.873 ; C1.2@122.611,114 C1.2@122.611,113.873 ; Q2.1@128.421,41.931 129.173,41.179 129.31,41.042 129.31,39.576 129.086,39.353 127.138,39.353 125.516,40.975 123.5,40.975 C1.2@122.611,41.864 ; Q2.1@128.421,65.934 129.173,65.182 129.31,65.045 129.31,63.579 129.086,63.356 127.138,63.356 125.516,64.978 123.5,64.978 C1.2@122.611,65.867 ; Q2.1@128.421,89.937 129.173,89.185 129.31,89.048 129.31,87.582 129.086,87.359 127.138,87.359 125.516,88.981 123.5,88.981 C1.2@122.611,89.87 ; Q2.1@128.421,113.94 129.173,113.188 129.31,113.051 129.31,111.585 129.086,111.362 127.138,111.362 125.516,112.984 123.5,112.984 C1.2@122.611,113.873
PD+: C6.1 J2.3 R6.2 U2.3 | length 206.3
  TOP w0.508: U2.3@144.135,31.197 144.135,29.927 145.071,28.991 149.611,28.991 149.707,29.087 149.834,29.087 C6.1@150.611,29.864 ; U2.3@144.135,55.2 144.135,53.93 145.071,52.994 149.611,52.994 149.707,53.09 149.834,53.09 C6.1@150.611,53.867 ; U2.3@144.135,79.203 144.135,77.933 145.071,76.997 149.611,76.997 149.707,77.093 149.834,77.093 C6.1@150.611,77.87 ; U2.3@144.135,103.206 144.135,101.936 145.071,101 149.611,101 149.707,101.096 149.834,101.096 C6.1@150.611,101.873 ; C6.1@150.611,29.991 C6.1@150.611,29.864 ; C6.1@150.611,53.994 C6.1@150.611,53.867 ; C6.1@150.611,77.997 C6.1@150.611,77.87 ; C6.1@150.611,102 C6.1@150.611,101.873 ; v1(181.5,31.991) J2.3@183.5,31.991 183.5,30.991 177.5,24.991 151.119,24.991 150.611,25.499 R6.2@150.611,26.991 C6.1@150.611,29.864 ; v1(181.5,55.994) J2.3@183.5,55.994 183.5,54.994 177.5,48.994 151.119,48.994 150.611,49.502 R6.2@150.611,50.994 C6.1@150.611,53.867 ; v1(181.5,79.997) J2.3@183.5,79.997 183.5,78.997 177.5,72.997 151.119,72.997 150.611,73.505 R6.2@150.611,74.997 C6.1@150.611,77.87 ; v1(181.5,104) J2.3@183.5,104 183.5,103 177.5,97 151.119,97 150.611,97.508 R6.2@150.611,99 C6.1@150.611,101.873
VCC: C2.1 C3.1 C8.1 D1.1 Q2.3 R17.1 U1.3 U4.5 | length 259
  TOP w0.508: U1.3@129.198,30.175 129.198,31.674 130.389,32.864 C3.1@130.389,32.991 C2.1@130.389,35.991 130.389,37.007 130.58,37.197 Q2.3@130.58,40.991 v1(130.58,42.912) ; U1.3@129.198,54.178 129.198,55.677 130.389,56.867 C3.1@130.389,56.994 C2.1@130.389,59.994 130.389,61.01 130.58,61.2 Q2.3@130.58,64.994 v1(130.58,66.915) ; U1.3@129.198,78.181 129.198,79.68 130.389,80.87 C3.1@130.389,80.997 C2.1@130.389,83.997 130.389,85.013 130.58,85.203 Q2.3@130.58,88.997 v1(130.58,90.918) ; U1.3@129.198,102.184 129.198,103.683 130.389,104.873 C3.1@130.389,105 C2.1@130.389,108 130.389,109.016 130.58,109.206 Q2.3@130.58,113 v1(130.58,114.921) ; v1(162.5,41.991) D1.1@162.5,40.729 165.476,40.729 166.611,41.864 C8.1@166.611,41.991 ; v1(162.5,65.994) D1.1@162.5,64.732 165.476,64.732 166.611,65.867 C8.1@166.611,65.994 ; v1(162.5,89.997) D1.1@162.5,88.735 165.476,88.735 166.611,89.87 C8.1@166.611,89.997 ; v1(162.5,114) D1.1@162.5,112.738 165.476,112.738 166.611,113.873 C8.1@166.611,114 ; v1(170.5,41.991) R17.1@171.611,41.991 171.611,40.975 171.5,40.864 U4.5@171.5,39.293 ; v1(170.5,65.994) R17.1@171.611,65.994 171.611,64.978 171.5,64.867 U4.5@171.5,63.296 ; v1(170.5,89.997) R17.1@171.611,89.997 171.611,88.981 171.5,88.87 U4.5@171.5,87.299 ; v1(170.5,114) R17.1@171.611,114 171.611,112.984 171.5,112.873 U4.5@171.5,111.302
  BOTTOM w0.508: v1(130.58,42.912) 161.579,42.912 ; v1(130.58,66.915) 161.579,66.915 ; v1(130.58,90.918) 161.579,90.918 ; v1(130.58,114.921) 161.579,114.921 ; v1(162.5,41.991) 161.579,42.912 ; v1(162.5,65.994) 161.579,66.915 ; v1(162.5,89.997) 161.579,90.918 ; v1(162.5,114) 161.579,114.921 ; v1(170.5,41.991) 169.5,41.991 168.58,42.912 161.579,42.912 ; v1(170.5,65.994) 169.5,65.994 168.58,66.915 161.579,66.915 ; v1(170.5,89.997) 169.5,89.997 168.58,90.918 161.579,90.918 ; v1(170.5,114) 169.5,114 168.58,114.921 161.579,114.921

## Text inside footprints (layer, text, board x,y; h text height)
R17: PIN_NUMBER "1" at 171.296,41.991 h0.79; PIN_NUMBER "2" at 173.074,41.991 h0.79; DIMENSION "80" at 172.195,40.34 h0.51; DIMENSION "50" at 174.405,41.762 h0.51
U1: PIN_NUMBER "1" at 133.506,102.184 h0.79 r180; PIN_NUMBER "3" at 128.884,102.184 h0.79 r180; PIN_NUMBER "2" at 131.195,102.184 h0.79 r180; PIN_NUMBER "4" at 131.195,95.834 h0.79 r180; ASSEMBLY_TOP "HAMP" at 130.24,99.406 h0.79 r180; ASSEMBLY_TOP "#TOL" at 130.24,99.406 h0.79 r180; ASSEMBLY_TOP "AMS1117-5" at 128.665,99.406 h0.79 r180
U1: PIN_NUMBER "1" at 133.506,78.181 h0.79 r180; PIN_NUMBER "3" at 128.884,78.181 h0.79 r180; PIN_NUMBER "2" at 131.195,78.181 h0.79 r180; PIN_NUMBER "4" at 131.195,71.831 h0.79 r180; ASSEMBLY_TOP "HAMP" at 130.24,75.403 h0.79 r180; ASSEMBLY_TOP "#TOL" at 130.24,75.403 h0.79 r180; ASSEMBLY_TOP "AMS1117-5" at 128.665,75.403 h0.79 r180
U1: PIN_NUMBER "1" at 133.506,54.178 h0.79 r180; PIN_NUMBER "3" at 128.884,54.178 h0.79 r180; PIN_NUMBER "2" at 131.195,54.178 h0.79 r180; PIN_NUMBER "4" at 131.195,47.828 h0.79 r180; ASSEMBLY_TOP "HAMP" at 130.24,51.4 h0.79 r180; ASSEMBLY_TOP "#TOL" at 130.24,51.4 h0.79 r180; ASSEMBLY_TOP "AMS1117-5" at 128.665,51.4 h0.79 r180
U1: PIN_NUMBER "1" at 133.506,30.175 h0.79 r180; PIN_NUMBER "3" at 128.884,30.175 h0.79 r180; PIN_NUMBER "2" at 131.195,30.175 h0.79 r180; PIN_NUMBER "4" at 131.195,23.825 h0.79 r180; ASSEMBLY_TOP "HAMP" at 130.24,27.397 h0.79 r180; ASSEMBLY_TOP "#TOL" at 130.24,27.397 h0.79 r180; ASSEMBLY_TOP "AMS1117-5" at 128.665,27.397 h0.79 r180
U2: PIN_NUMBER "4" at 145.09,103.206 h0.79 r90; PIN_NUMBER "7" at 142.55,108.794 h0.79 r90; PIN_NUMBER "1" at 141.28,103.206 h0.79 r90; PIN_NUMBER "6" at 143.82,108.794 h0.79 r90; PIN_NUMBER "5" at 145.09,108.794 h0.79 r90; PIN_NUMBER "2" at 142.55,103.206 h0.79 r90; PIN_NUMBER "3" at 143.82,103.206 h0.79 r90; PIN_NUMBER "8" at 141.28,108.794 h0.79 r90; DIMENSION "5.59" at 138.865,106.61 h0.64 r90; DIMENSION "220.00" at 138.865,102.139 h0.64 r90; DIMENSION "3.99" at 148.517,107.499 h0.64 r90; DIMENSION "157.00" at 148.517,103.028 h0.64 r90; DIMENSION "5" at 144.453,119.64 h0.64 r90; DIMENSION "197.00" at 144.453,115.169 h0.64 r90; DIMENSION "1.27" at 142.548,114.839 h0.64 r90; DIMENSION "50.00" at 142.548,110.928 h0.64 r90
U2: PIN_NUMBER "4" at 145.09,79.203 h0.79 r90; PIN_NUMBER "7" at 142.55,84.791 h0.79 r90; PIN_NUMBER "1" at 141.28,79.203 h0.79 r90; PIN_NUMBER "6" at 143.82,84.791 h0.79 r90; PIN_NUMBER "5" at 145.09,84.791 h0.79 r90; PIN_NUMBER "2" at 142.55,79.203 h0.79 r90; PIN_NUMBER "3" at 143.82,79.203 h0.79 r90; PIN_NUMBER "8" at 141.28,84.791 h0.79 r90; DIMENSION "5.59" at 138.865,82.607 h0.64 r90; DIMENSION "220.00" at 138.865,78.136 h0.64 r90; DIMENSION "3.99" at 148.517,83.496 h0.64 r90; DIMENSION "157.00" at 148.517,79.025 h0.64 r90; DIMENSION "5" at 144.453,95.637 h0.64 r90; DIMENSION "197.00" at 144.453,91.166 h0.64 r90; DIMENSION "1.27" at 142.548,90.836 h0.64 r90; DIMENSION "50.00" at 142.548,86.925 h0.64 r90
U2: PIN_NUMBER "4" at 145.09,55.2 h0.79 r90; PIN_NUMBER "7" at 142.55,60.788 h0.79 r90; PIN_NUMBER "1" at 141.28,55.2 h0.79 r90; PIN_NUMBER "6" at 143.82,60.788 h0.79 r90; PIN_NUMBER "5" at 145.09,60.788 h0.79 r90; PIN_NUMBER "2" at 142.55,55.2 h0.79 r90; PIN_NUMBER "3" at 143.82,55.2 h0.79 r90; PIN_NUMBER "8" at 141.28,60.788 h0.79 r90; DIMENSION "5.59" at 138.865,58.604 h0.64 r90; DIMENSION "220.00" at 138.865,54.133 h0.64 r90; DIMENSION "3.99" at 148.517,59.493 h0.64 r90; DIMENSION "157.00" at 148.517,55.022 h0.64 r90; DIMENSION "5" at 144.453,71.634 h0.64 r90; DIMENSION "197.00" at 144.453,67.163 h0.64 r90; DIMENSION "1.27" at 142.548,66.833 h0.64 r90; DIMENSION "50.00" at 142.548,62.922 h0.64 r90
U2: PIN_NUMBER "4" at 145.09,31.197 h0.79 r90; PIN_NUMBER "7" at 142.55,36.785 h0.79 r90; PIN_NUMBER "1" at 141.28,31.197 h0.79 r90; PIN_NUMBER "6" at 143.82,36.785 h0.79 r90; PIN_NUMBER "5" at 145.09,36.785 h0.79 r90; PIN_NUMBER "2" at 142.55,31.197 h0.79 r90; PIN_NUMBER "3" at 143.82,31.197 h0.79 r90; PIN_NUMBER "8" at 141.28,36.785 h0.79 r90; DIMENSION "5.59" at 138.865,34.601 h0.64 r90; DIMENSION "220.00" at 138.865,30.13 h0.64 r90; DIMENSION "3.99" at 148.517,35.49 h0.64 r90; DIMENSION "157.00" at 148.517,31.019 h0.64 r90; DIMENSION "5" at 144.453,47.631 h0.64 r90; DIMENSION "197.00" at 144.453,43.16 h0.64 r90; DIMENSION "1.27" at 142.548,42.83 h0.64 r90; DIMENSION "50.00" at 142.548,38.919 h0.64 r90
U3: PIN_NUMBER "3" at 157.265,101 h0.79 r270; PIN_NUMBER "2" at 155.106,100.06 h0.79 r270; PIN_NUMBER "1" at 155.106,101.94 h0.79 r270
U3: PIN_NUMBER "3" at 157.265,76.997 h0.79 r270; PIN_NUMBER "2" at 155.106,76.057 h0.79 r270; PIN_NUMBER "1" at 155.106,77.937 h0.79 r270
U3: PIN_NUMBER "3" at 157.265,52.994 h0.79 r270; PIN_NUMBER "2" at 155.106,52.054 h0.79 r270; PIN_NUMBER "1" at 155.106,53.934 h0.79 r270
U3: PIN_NUMBER "3" at 157.265,28.991 h0.79 r270; PIN_NUMBER "2" at 155.106,28.051 h0.79 r270; PIN_NUMBER "1" at 155.106,29.931 h0.79 r270
U4: PIN_NUMBER "1" at 171.048,107.289 h0.79 r90; PIN_NUMBER "2" at 172.369,108.381 h0.79 r90; PIN_NUMBER "5" at 171.185,111.302 h0.79 r90; PIN_NUMBER "3" at 174.182,108 h0.79 r90; PIN_NUMBER "4" at 174.182,111.302 h0.79 r90
U4: PIN_NUMBER "1" at 171.048,83.286 h0.79 r90; PIN_NUMBER "2" at 172.369,84.378 h0.79 r90; PIN_NUMBER "5" at 171.185,87.299 h0.79 r90; PIN_NUMBER "3" at 174.182,83.997 h0.79 r90; PIN_NUMBER "4" at 174.182,87.299 h0.79 r90
U4: PIN_NUMBER "1" at 171.048,59.283 h0.79 r90; PIN_NUMBER "2" at 172.369,60.375 h0.79 r90; PIN_NUMBER "5" at 171.185,63.296 h0.79 r90; PIN_NUMBER "3" at 174.182,59.994 h0.79 r90; PIN_NUMBER "4" at 174.182,63.296 h0.79 r90
U4: PIN_NUMBER "1" at 171.048,35.28 h0.79 r90; PIN_NUMBER "2" at 172.369,36.372 h0.79 r90; PIN_NUMBER "5" at 171.185,39.293 h0.79 r90; PIN_NUMBER "3" at 174.182,35.991 h0.79 r90; PIN_NUMBER "4" at 174.182,39.293 h0.79 r90